# Altium PCB RcMPPT-SCC.PcbDoc (part 2 of 2)
Units mm, origin at the board's own origin, x right, y up, seen from the top; angles counter-clockwise.
Board outline 99.06 x 55.88 mm, 4 copper layers (Top Layer, Mid Layer 1, Mid Layer 2, Bottom Layer), stack 1.57 mm thick; 95 components, 80 nets, 471 pads, 150 vias.
Unrouted connection lines stored in the file: 61.
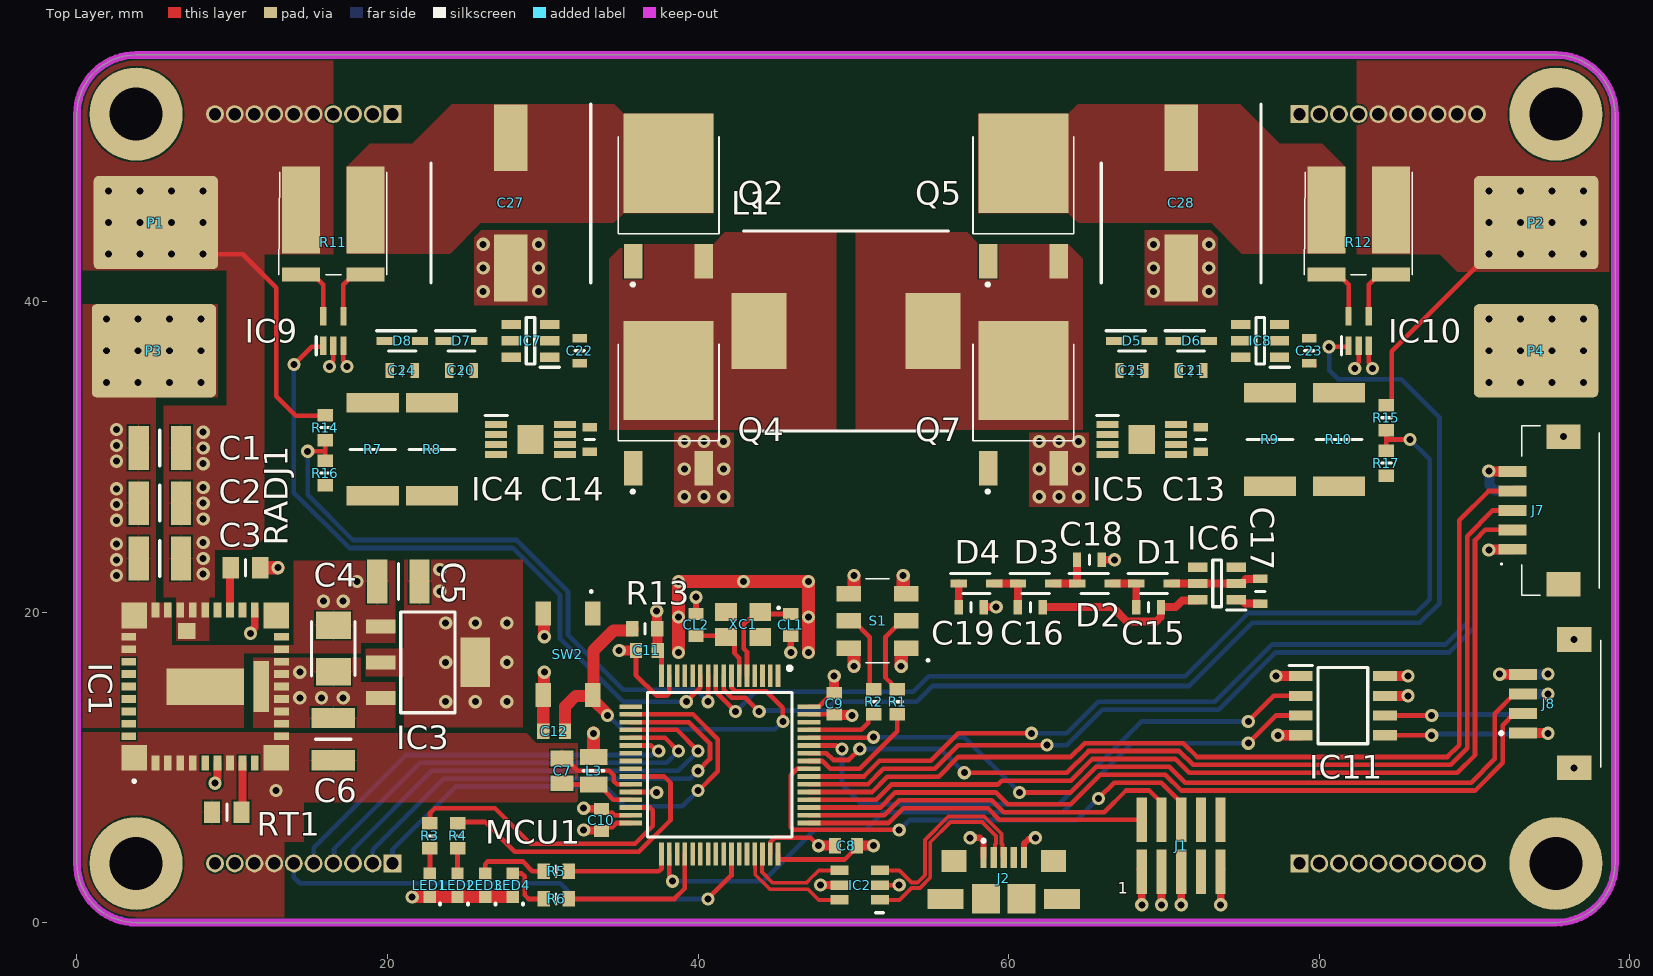
[diagram p0: Top Layer view]

## Via types
v1: diameter 0.85, hole 0.45, Top Layer to Bottom Layer, 150 vias

## Nets (pads, with @x,y where several pads share a name; then routed paths per layer and width w, separated by ;. In a path a pad name is that pad's centre, name@x,y a point inside that pad or via, vN(x,y) a via of type N, cw(c..) or ccw(c..) an arc to the next point about the centre after c; other vN are vias at no path point) (continued)
VCC: C1.1 C2.1 C3.1 IC1.26 IC1.27 IC1.28 IC1.42 J6.5 J6.6 J6.7 J6.8 J6.9 J6.10 P1.1 R11.1 R14.1 | length 16.3
  Top Layer w0.3: P1.1@8.128,43.053 10.668,43.053 12.827,40.894 12.827,33.909 14.097,32.639 R14.1@16.002,32.639
  other v1: 8.128,22.442 8.128,23.458 8.128,24.474 8.128,25.998 8.128,27.014 8.128,28.03 8.128,29.554 8.128,30.57 8.128,31.586
Vout: J3.5 J3.6 J3.7 J3.8 J3.9 J3.10 P2.1 R12.2 R15.1 | length 12.5
  Top Layer w0.3: R15.1 84.428,33.312 84.678,33.562 84.678,36.799 P2.1@90.932,43.053
pads on no net: IC1.6 IC1.20 IC1.21 IC1.23 IC1.25 IC1.34 IC1.35 IC1.36 IC1.37 IC1.38 IC1.39 IC1.40 IC4.5 IC5.5 IC6.3 IC7.3 IC8.3 J1.7 J1.8 J1.10 J2.4 J2.6 J2.7 J2.8 J2.9 J2.10 J2.11 J5.1 J5.2 J5.3 J5.4 J5.5 J5.6 J5.7 J5.8 J5.9 J5.10 J10.MP2 MCU1.1 MCU1.2 MCU1.3 MCU1.4 MCU1.12 MCU1.13 MCU1.14 MCU1.17 MCU1.23 MCU1.24 MCU1.25 MCU1.35 MCU1.37 MCU1.43 MCU1.44 MCU1.62 SW2.1

## Polygon pours and split planes (outlines as drawn)
NetC14_2 on Top Layer "NETC14_2_L01_P041" (solid, pour order 41): 63.84,43.695 58.08,43.695 57.325,44.45 50.165,44.45 50.165,31.75 64.77,31.75 64.77,42.765
PGND on Top Layer "PGND_L01_P045" (solid, pour order 45): 26.035,44.577 25.599,44.141 25.599,39.751 30.281,39.751 30.281,44.577
PGND on Top Layer "PGND_L01_P044" (solid, pour order 44): 73.025,44.577 73.461,44.141 73.461,39.751 68.779,39.751 68.779,44.577
PGND on Top Layer "PGND_L01_P043" (solid, pour order 43): 65.151,31.551 65.151,26.797 61.341,26.797 61.341,31.551
PGND on Top Layer "PGND_L01_P042" (solid, pour order 42): 42.291,31.551 42.291,26.797 38.481,26.797 38.481,31.551
NetC13_2 on Top Layer "NETC13_2_L01_P040" (solid, pour order 40): 35.22,43.695 40.98,43.695 41.735,44.45 48.895,44.45 48.895,31.75 34.29,31.75 34.29,42.765
NetC27_1 on Top Layer "NETC27_1_L01_P037" (solid, pour order 37): 24.13,52.705 21.59,50.165 18.853,50.165 17.37,48.682 17.37,43.082 24.032,43.082 26.017,45.068 34.573,45.068 35.2,45.695 41,45.695 41,52.095 35.2,52.095 34.59,52.705
NetC28_1 on Top Layer "NETC28_1_L01_P036" (solid, pour order 36): 74.93,52.705 77.47,50.165 80.207,50.165 81.69,48.682 81.69,43.082 75.028,43.082 73.043,45.068 64.487,45.068 63.86,45.695 58.06,45.695 58.06,52.095 63.86,52.095 64.47,52.705
VCC on Top Layer "VCC_L01_P001" (solid, remove dead copper, pour order 1): 12.065,55.88 16.51,55.88 16.51,43.053 12.065,43.053 12.065,24.795 11.272,24.003 8.89,24.003 8.89,20.955 8.505,20.955 8.505,18.153 6.405,18.153 6.405,20.955 5.588,20.955 5.588,33.274 9.652,33.274 9.652,42 0,42 0,55.88
Vout on Top Layer "VOUT_L01_P035" (solid, pour order 35): 82.423,55.88 82.423,43.053 87.757,43.053 88.9,41.91 99.06,41.91 99.06,55.88
3V3 on Top Layer "3V3_L01_P033" (solid, pour order 33): 21.082,17.653 21.082,23.368 28.702,23.368 28.702,12.573 21.082,12.573 21.082,15.875 18.606,15.875 18.606,17.653
+5 on Top Layer "+5_L01_P005" (solid, pour order 5): 13.696,12.553 20.506,12.553 20.506,15.494 18.288,15.494 18.288,17.053 13.655,17.053 11.355,17.053 11.355,12.553
PGND on Top Layer "PGND_L01_P003" (solid, pour order 3): 20.506,23.309 13.97,23.309 13.97,20.028 13.97,17.907 13.933,17.87 13.655,17.87 6.105,17.87 6.105,20.603 5.08,20.603 5.08,31.78 5.08,33.83 9.08,33.83 9.08,39.83 0,39.83 0,12.553 10.755,12.553 10.755,17.353 13.655,17.353 18.288,17.353 18.288,18.034 20.506,18.034
AGND on Top Layer "AGND_L01_P002" (solid, pour order 2): 14.605,5.207 13.335,5.207 13.335,0 0,0 0,12.253 13.655,12.253 13.655,12.192 28.956,12.192 29.591,11.557 32.267,11.557 32.267,7.747 28.185,7.747 14.605,7.747
Vout on Bottom Layer "VOUT_L04_P050" (solid, pour order 50): 82.423,55.88 82.423,43.053 87.757,43.053 88.9,41.91 99.06,41.91 99.06,55.88
NetC28_1 on Bottom Layer "NETC28_1_L04_P049" (solid, pour order 49): 74.93,52.705 77.47,50.165 80.207,50.165 81.69,48.682 81.69,43.082 75.028,43.082 73.043,45.068 64.487,45.068 63.86,45.695 58.06,45.695 58.06,52.095 63.86,52.095 64.47,52.705
NetC27_1 on Bottom Layer "NETC27_1_L04_P048" (solid, pour order 48): 24.13,52.705 21.59,50.165 18.853,50.165 17.37,48.682 17.37,43.082 24.032,43.082 26.017,45.068 34.573,45.068 35.2,45.695 41,45.695 41,52.095 35.2,52.095 34.59,52.705
NetC14_2 on Bottom Layer "NETC14_2_L04_P047" (solid, pour order 47): 63.84,43.695 58.08,43.695 57.325,44.45 50.165,44.45 50.165,31.75 64.77,31.75 64.77,42.765
NetC13_2 on Bottom Layer "NETC13_2_L04_P046" (solid, pour order 46): 35.22,43.695 40.98,43.695 41.735,44.45 48.895,44.45 48.895,31.75 34.29,31.75 34.29,42.765
PGND on Bottom Layer "PGND_L04_P013" (solid, pour order 13): 5.08,32.766 9.906,32.766 9.906,41.148 0,41.148 0,32.348 0,12.553 10.795,12.553 10.795,20.603 5.08,20.603
VCC on Bottom Layer "VCC_L04_P012" (solid, pour order 12): 8.89,24.003 12.065,24.003 12.065,55.88 0,55.88 0,41.656 10.414,41.656 10.414,32.258 5.678,32.258 5.588,32.258 5.588,20.955 8.89,20.955
AGND on Bottom Layer "AGND_L04_P016" (solid, pour order 16): 14.605,5.222 14.59,5.207 13.335,5.207 13.335,0.254 0,0.254 0,12.253 11.355,12.253 11.355,21.336 9.381,21.336 9.381,23.56 14.605,23.56
+5 on Mid Layer 2 "+5_L03_P032" (solid, pour order 32): 92.71,23.876 92.71,30.099 89.662,30.099 89.662,23.876 21.844,23.876 21.844,8.382 21.844,3.048 53.975,3.048 53.975,5.969 65.405,5.969 65.405,0 21.844,0 0,0 0,55.88 99.06,55.88 99.06,23.876 99.06,0 81.788,0 81.788,16.72 88.9,16.72 88.9,14.732 92.71,14.732
3V3 on Mid Layer 2 "3V3_L03_P031" (solid, pour order 31): 92.329,29.718 90.043,29.718 90.043,23.368 60.198,23.368 22.352,23.368 22.352,3.429 53.594,3.429 53.594,6.35 65.786,6.35 65.786,0 81.28,0 81.28,17.145 89.281,17.145 89.281,15.113 92.329,15.113
PGND on Mid Layer 1 "PGND_L02_P028" (solid, pour order 28): 0,55.88 99.06,55.88 99.06,0 0,0

## Keep-outs
Mid Layer 1:
  lines w0.01: 42.152,15.898 42.152,16.625 42.14,16.637 38.1,16.637 38.1,22.606 47.752,22.606 47.752,16.637 43.688,16.637 43.652,16.601 43.652,15.898
Keep-Out Layer:
  the board outline again, w0.5

## Silkscreen, mask and mechanical layers (free items; w line width, h text height)
Board:
  the board outline again, w0.254

## Text inside footprints (layer, text, board x,y; h text height)
J1: Top Overlay "1" at 67.031,1.854 h0.76